# Altium PCB Card_reader2.PcbDoc
Units mm, origin at the board's own origin, x right, y up, seen from the top; angles counter-clockwise.
Board outline 95 x 98.99 mm, 2 copper layers (Top Layer, Bottom Layer); 36 components, 37 nets, 144 pads, 41 vias.
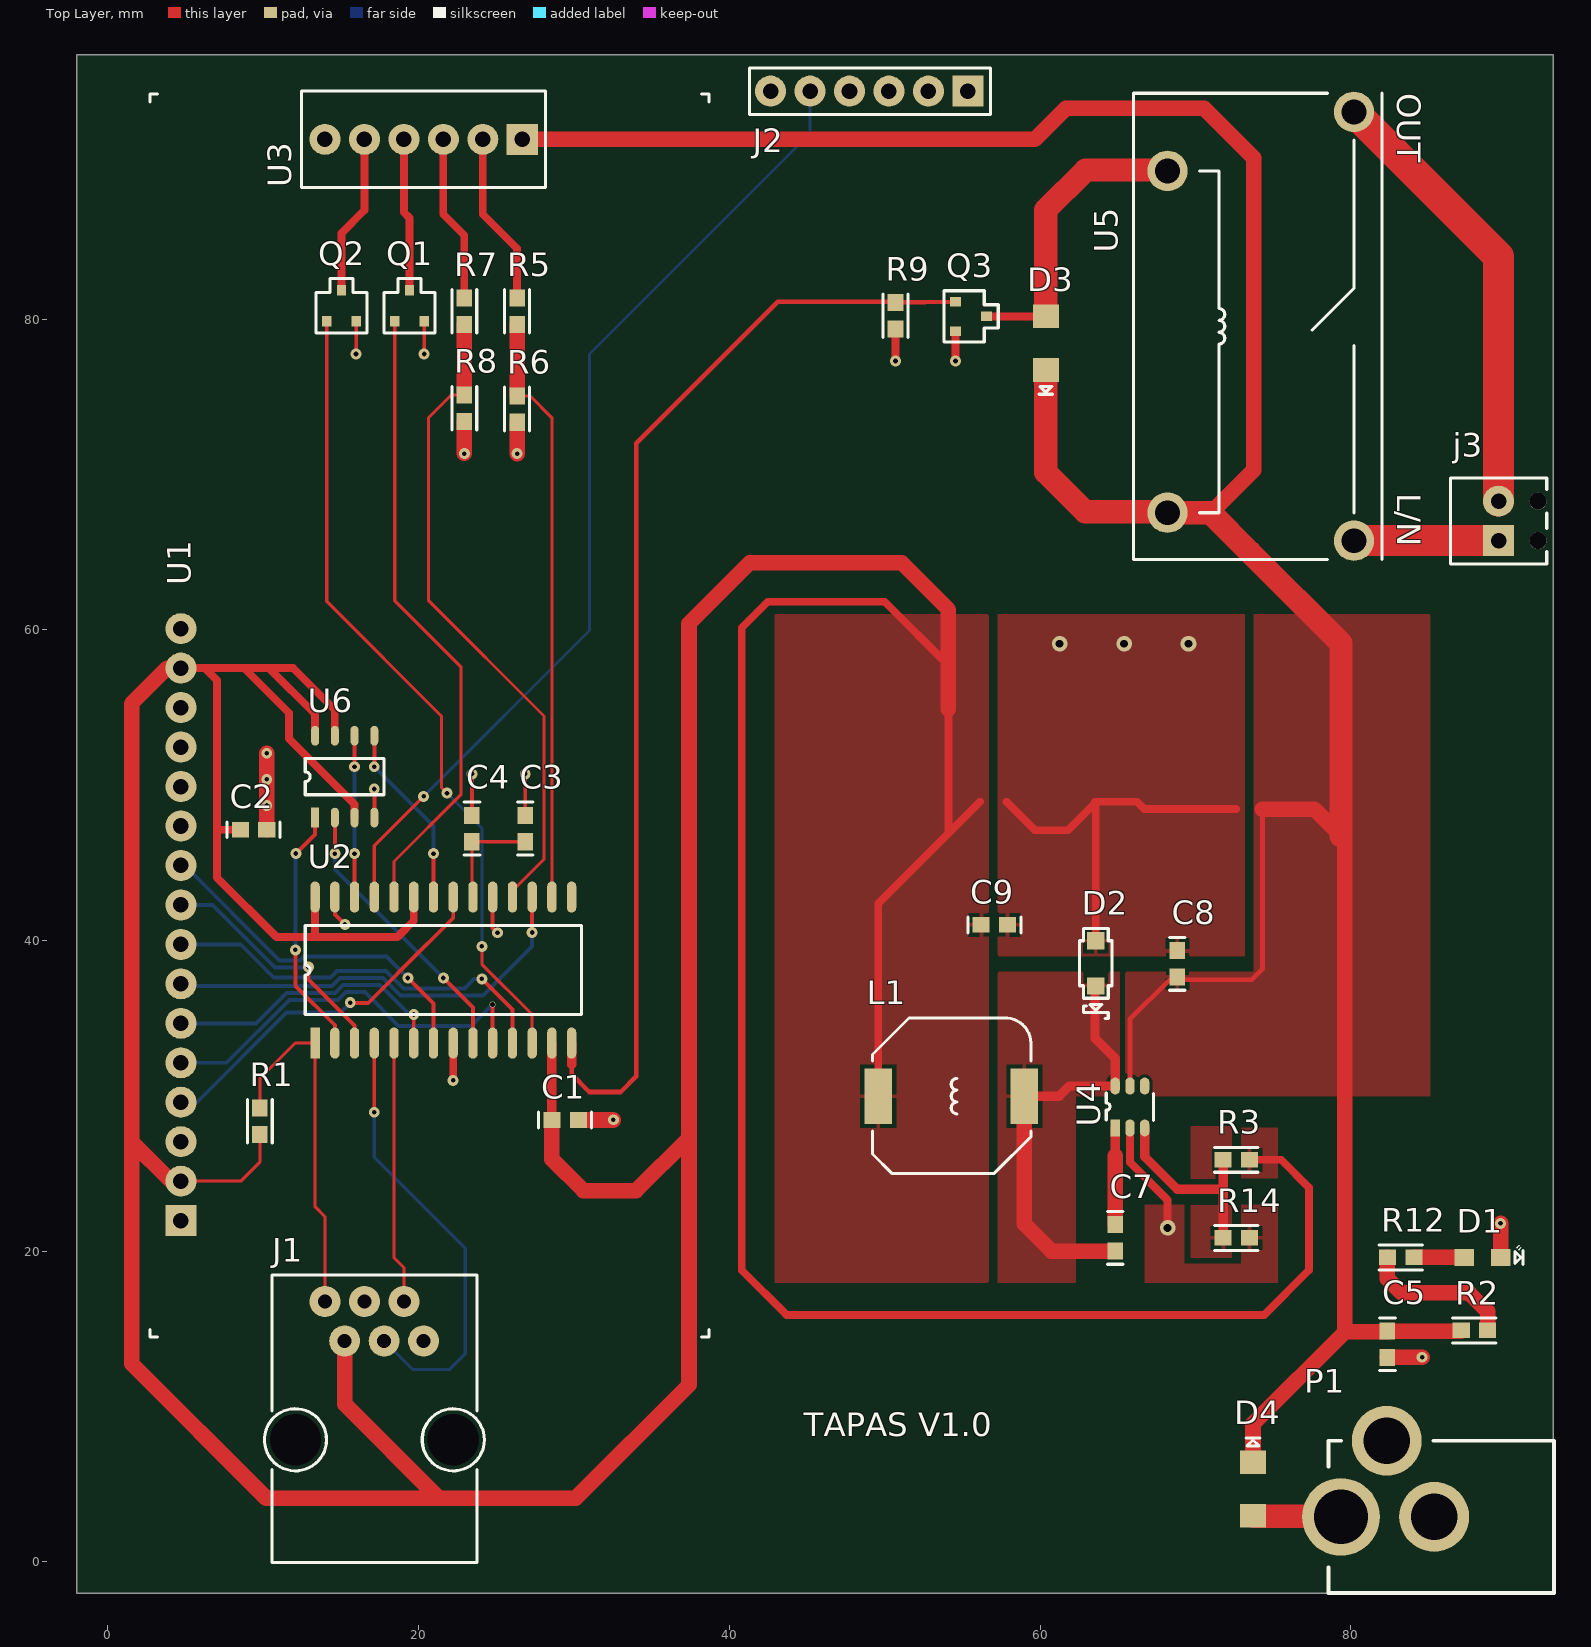
[diagram p0: Top Layer view]
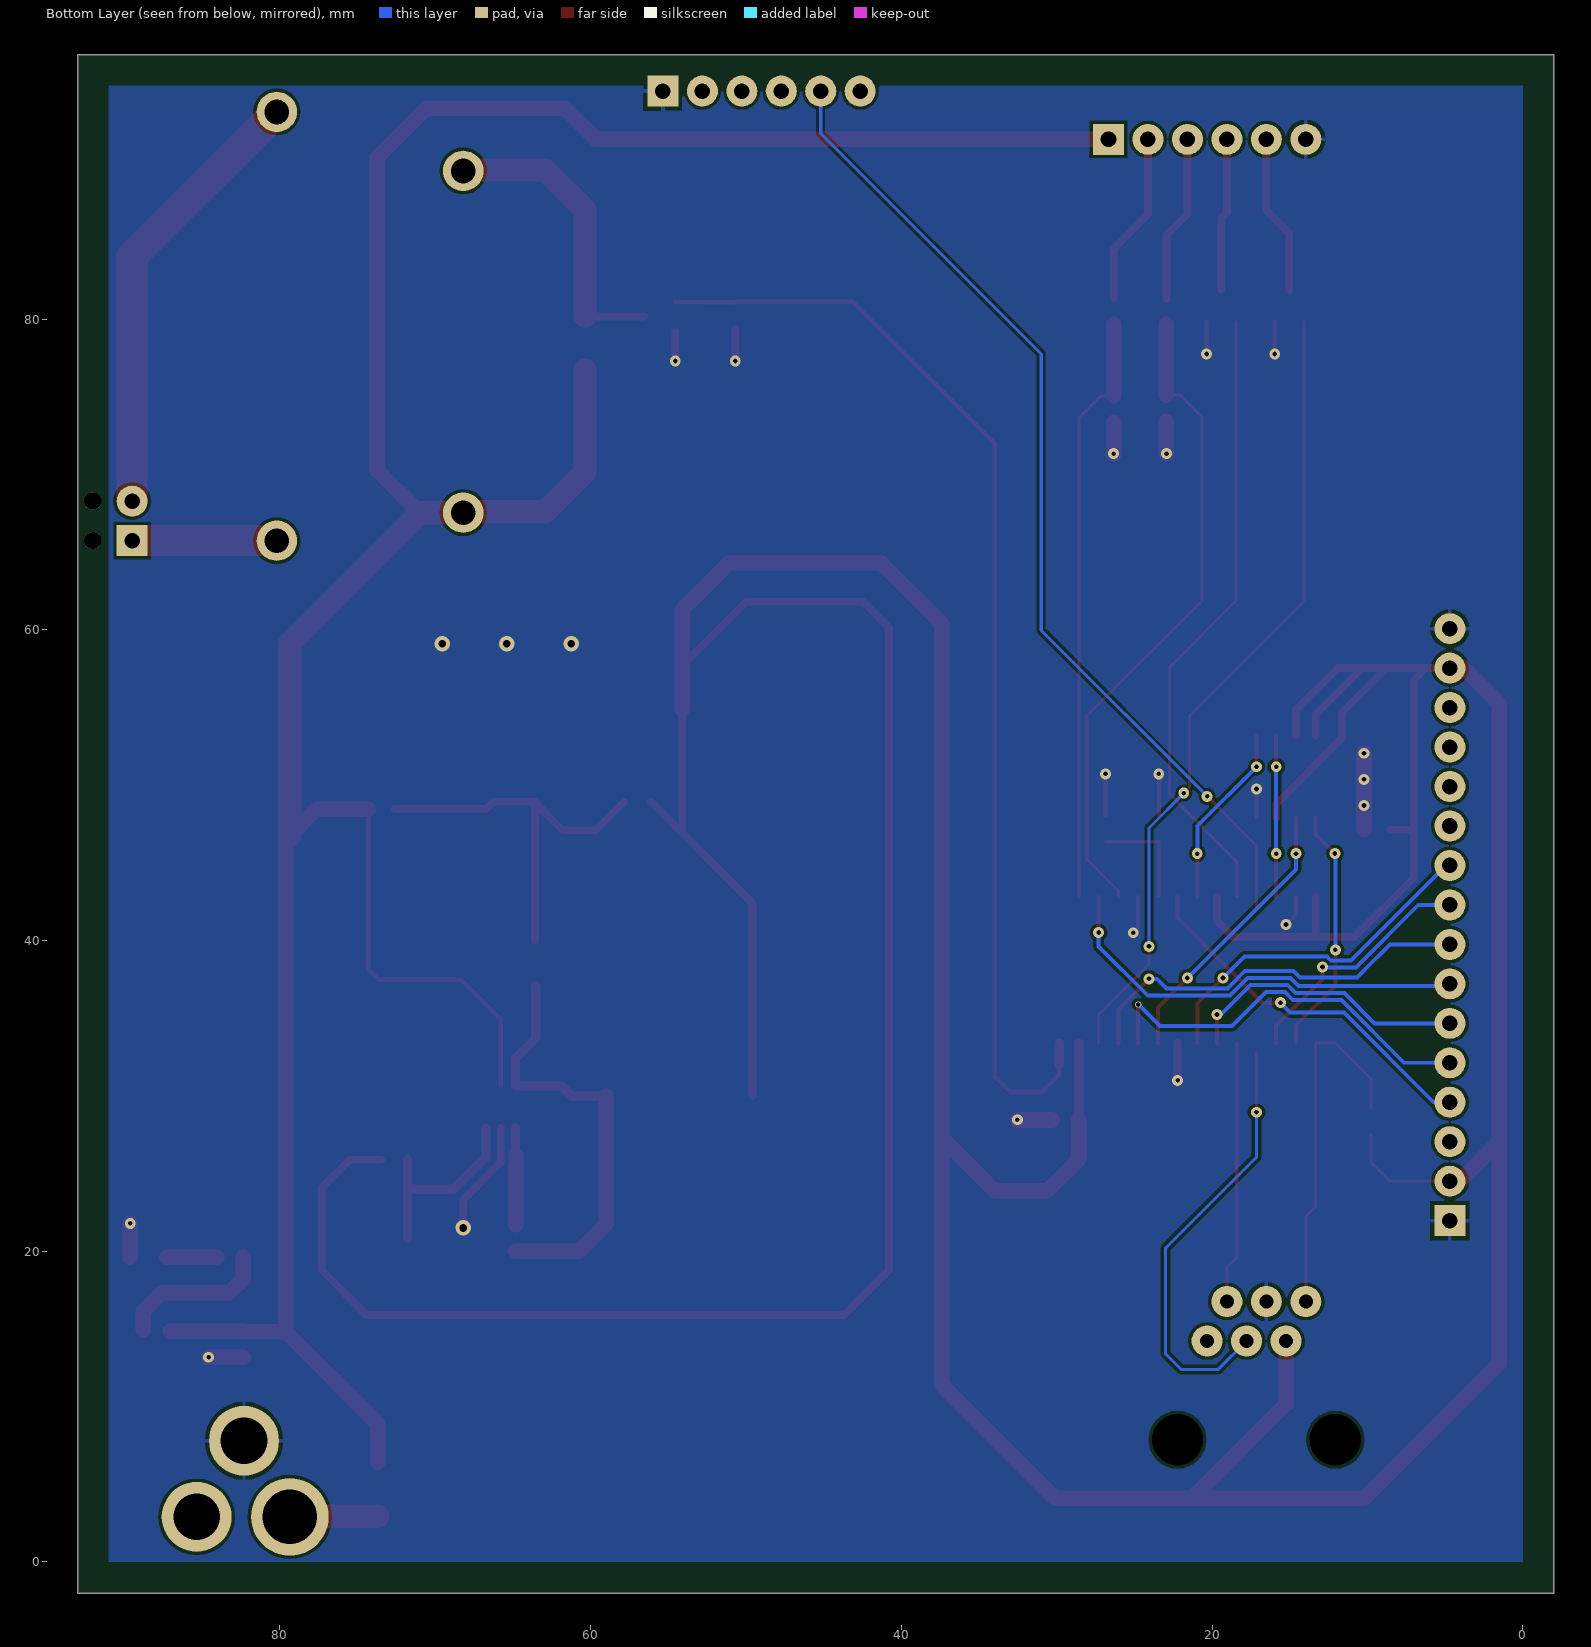
[diagram p1: Bottom Layer view, seen from below]
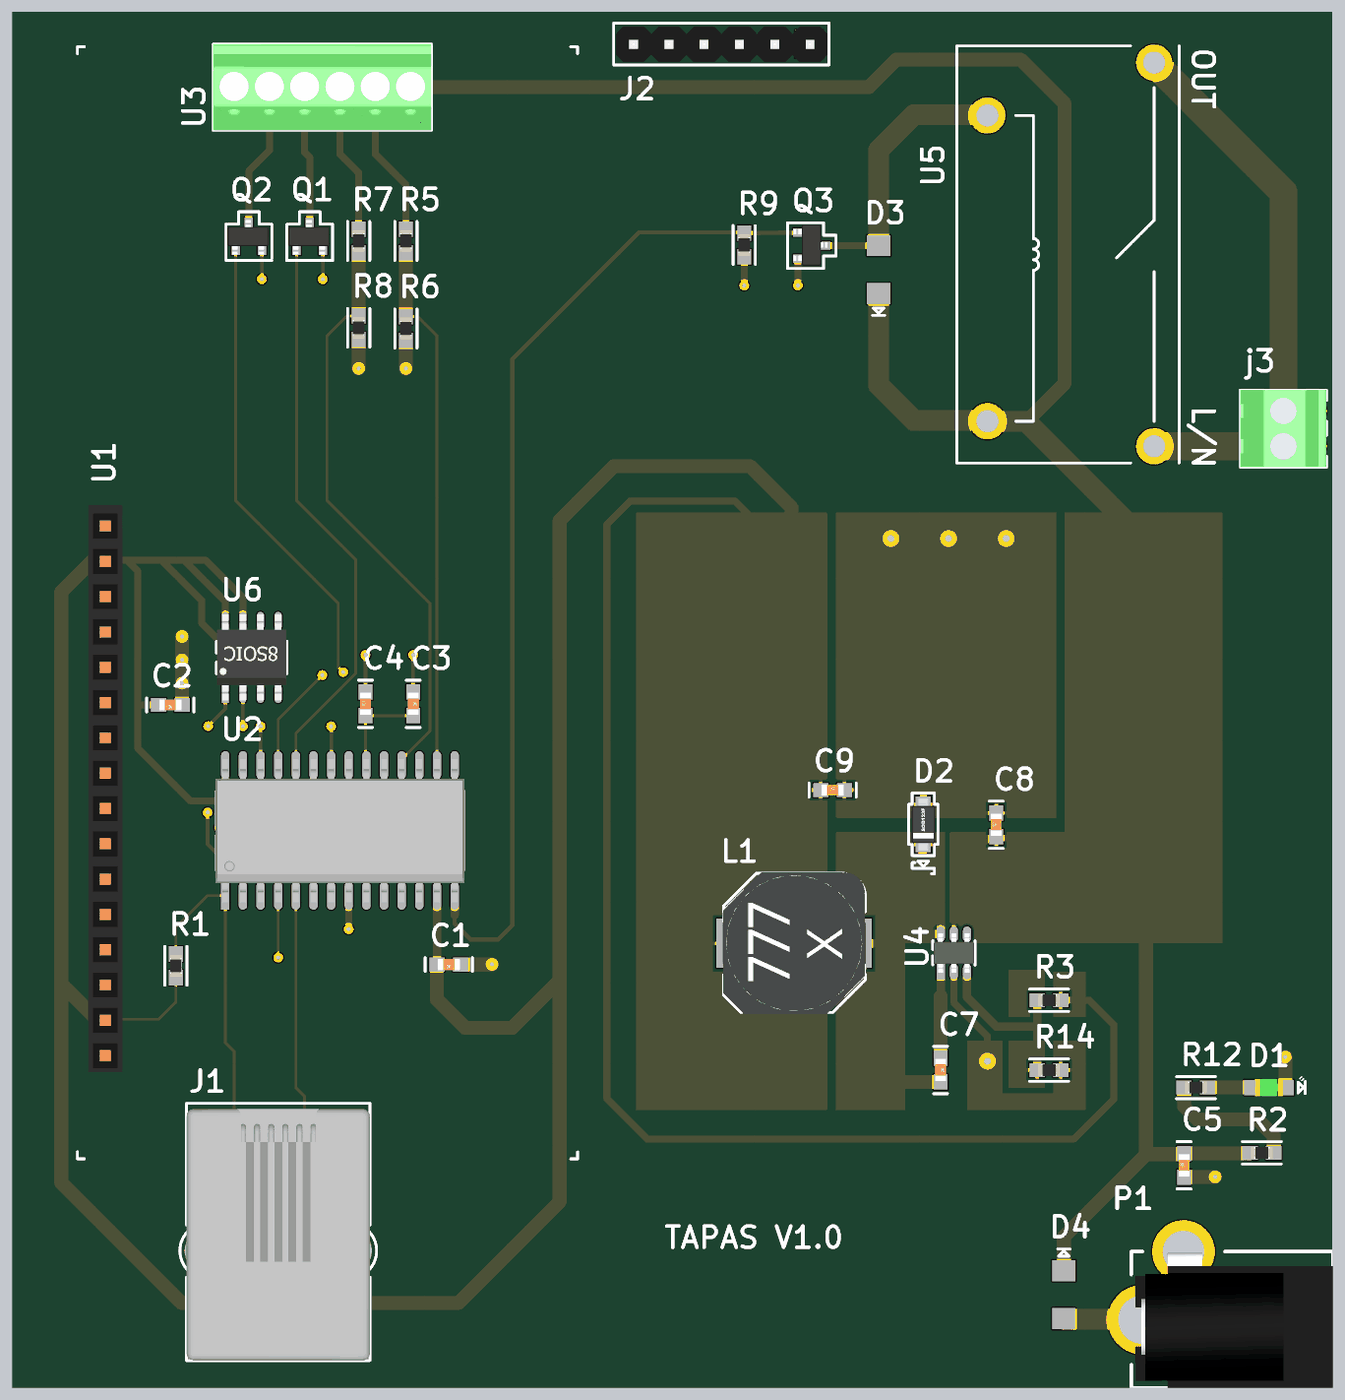
[diagram p2: 3D render of the assembled board from above, using the file's embedded part models]

## Layer stack, top to bottom
Top Solder: solder mask 0.0102, Solder Resist, Dk 3.5
Top Layer: signal copper 0.0356
Dielectric 1: dielectric 0.32, FR-4, Dk 4.8
Bottom Layer: signal copper 0.0356
Bottom Solder: solder mask 0.0102, Solder Resist, Dk 3.5

## Board outline
93.012,-1.997 93.012,96.996 -1.992,96.996 -1.992,-1.997

## Design rules (kind name [scope] priority, off if disabled: settings)
Clearance [All] p1: gap=0.2
Height [All] p1: minheight=0 maxheight=40 prefheight=12.7
HoleSize [All] p1: absolutevalues=TRUE maxlimit=4 minlimit=0.025 maxpercent=80.000 minpercent=20.000
MinimumSolderMaskSliver [All] p1: minsoldermaskwidth=0.1
PolygonConnect "Direct connect" [IsVia] p1: connectstyle=Direct reliefconductorwidth=0.254 reliefentries=4 polygonreliefangle="90 Angle" airgapwidth=0.254
PolygonConnect [All] p2: connectstyle=Relief reliefconductorwidth=0.254 reliefentries=4 polygonreliefangle="90 Angle" airgapwidth=0.254
RoutingVias [All] p1: holewidth=0.3 width=0.4 viastyle="Through Hole" minholewidth=0.3 minwidth=0.4 maxholewidth=0.711 maxwidth=1.27
SilkToSilkClearance [All] p1: silktosilkclearance=0.1
SilkToSolderMaskClearance [IsPad] p1: minsilkscreentomaskgap=0.1 clearancetoexposedcopper=TRUE
SolderMaskExpansion [All] p1: expansion=0.102
UnpouredPolygon [All] p1: allowunpoured=FALSE
Width [All] p1: maxlimit=2 minlimit=0.2 preferedwidth=0.2
24 further rules are at their usual default settings.

## Classes and differential pairs
component class Designator: C5 C7 C8 C9 D1 D2 D4 L1 P1 R2 R3 R12 R14 U4
component class Flash: U6
component class LCD: U1
component class PIC: C1 C2 C3 C4 J1 J2 R1 U2
component class Reader: Q1 Q2 R5 R6 R7 R8 U3
component class Relay: D3 j3 Q3 R9 U5

## Components (designator, comment, footprint, x,y, rotation, side; value= is the part's Value field where it differs from the comment)
C1 "100nF" "CAP 0603" 29.425,28.448 r180 top
C2 "100nF" "CAP 0603" 9.375,47.125 r180 top
C3 "10uF" "CAP 0603" 26.86,47.205 r270 top
C4 "1uF" "CAP 0603" 23.431,47.205 r90 top
C5 "10uF" "CAP 0603" 82.354,14.013 r90 top
C7 "100nF" "CAP 0603" 64.832,20.86 r270 top
C8 "4.7uF" "CAP 0603" 68.832,38.5 r90 top
C9 "22uF" "CAP 0603" 57.057,41 r0 top
D1 "Green LED" "LED 2012" 88.467,19.6 r0 top
D2 "Diode BAT17" "SOD-123F 12 mm" 61.282,34.285 r90 top
D3 "GF1A" SMA/DO-214AC_21 60.365,78.444 r270 top
D4 "GF1A" SMA/DO-214AC_21 73.7,4.7 r90 top
J1 "Program / Debug" RJ12_90 23.75,18.464 r270 top
J2 "Serial" "Header 6 pin" 49,94.667 r180 top
j3 "Bornier 2 pin" "BORNIER 2 PIN" 89.507,65.735 r90 top
L1 "33uH" IND 54.282,29.985 r90 top
P1 "MJ-179PH" "DC Jack" 93.061,2.902 r180 top
Q1 "2N7002" TO-236AB 19.412,80.853 r180 top
Q2 "2N7002" TO-236AB 15.035,80.853 r180 top
Q3 "2N7002" TO-236AB 55.555,80.169 r90 top
R1 "4.7k" "RES 0603" 9.779,28.36 r270 top
R2 "470R" "RES 0603" 87.952,14.901 r180 top
R3 "28K" "RES 0603" 72.632,25.885 r0 top
R5 "58K" "RES 0603" 26.338,80.505 r90 top
R6 "22K" "RES 0603" 26.338,74.207 r90 top
R7 "58K" "RES 0603" 22.938,80.505 r90 top
R8 "22K" "RES 0603" 22.938,74.256 r90 top
R9 "20K" "RES 0603" 50.691,80.212 r270 top
R12 "20R" "RES 0603" 83.204,19.6 r180 top
R14 "8.45K" "RES 0603" 72.632,20.86 r180 top
U1 "FDCC1602L-NSWBBW-91LE" "LCD (Only header)" 2.699,94.471 r90 top locked
U2 "PIC32MX220F032B" "SOIC (28)" 21.59,38.1 r90 top locked
U3 "LXM-R11_1" "Bornier 6 pin" 13.97,91.567 r180 top
U4 "LMR16006" "SOT (6)" 65.782,29.285 r90 top
U5 "Relay" Relay 66,64.534 r270 top
U6 "SST26VF032B-104I/SM" "SOIC 8" 15.24,50.546 r90 top

## Footprints (in the part's own frame and the unit in brackets; to place one, negate y for a bottom-side part, rotate by r counter-clockwise, add the part's x,y. Pads: shape width x height; smd on the part's side, far side on the other; paste and mask are expansions set on the pad)
"BORNIER 2 PIN" [mm]
  round 1.1 hole 1.1: 0(0,-2.54) 0(2.54,-2.54)
  rect 2x2 hole 1: 1(0,0)
  round 2 hole 1: 2(2.54,0)
  silkscreen extent -1.5,-3.1 4.04,3.1, body extent -1.5,-3.1 4.04,3.1, height 8.5
"Bornier 6 pin" [mm]
  rect 2x2 hole 1: 1(-12.7,0)
  round 2 hole 1: 2(-10.16,0) 3(-7.62,0) 4(-5.08,0) 5(-2.54,0) 6(0,0)
  silkscreen extent -14.2,-3.1 1.5,3.1, body extent -14.2,-3.1 1.5,3.1, height 8.5
"CAP 0603" [mm]
  rect 1.1x1 smd: 1(-0.85,0) 2(0.85,0)
  silkscreen extent -1.7,-0.5 1.7,0.5, body extent -0.8,-0.4 0.8,0.4, height 0.3
"DC Jack" [mm]
  round 5 hole 3.5: 1(13.7,0)
  round 4.5 hole 3: 2(10.75,-4.9) 3(7.7,0)
  silkscreen extent 0,-4.9 14.5,4.9, body extent 0,-4.8 14.2,4.9, height 10.75
"Header 6 pin" [mm]
  rect 2x2 hole 1: 1(-6.35,0)
  round 2 hole 1: 2(-3.81,0) 3(-1.27,0) 4(1.27,0) 5(3.81,0) 6(6.35,0)
  silkscreen extent -7.8,-1.5 7.7,1.5, body extent -7.7,-1.25 7.54,1.29, height 8.85
IND [mm]
  rect 3.56x1.78 smd: 1(0,-4.7) 2(0,4.7)
  silkscreen extent -4.98,-5.13 5.02,5.07, body extent -5.1,-5.15 5.1,5.15, height 5
"LCD (Only header)" [mm]
  rect 2x2 hole 1: 1(-72.5,-2)
  round 2 hole 1: 2(-69.96,-2) 3(-67.42,-2) 4(-64.88,-2) 5(-62.34,-2) 6(-59.8,-2) 7(-57.26,-2) 8(-54.72,-2) 9(-52.18,-2) 10(-49.64,-2) 11(-47.1,-2) 12(-44.56,-2) 13(-42.02,-2) 14(-39.48,-2) 15(-36.94,-2) 16(-34.4,-2)
  silkscreen extent -80,-36 0,0, body extent -73.75,-3.24 -32.96,-0.76, height 8.79
"LED 2012" [mm]
  rect 1.25x1.1 smd: 1(-1.175,0) 2(1.175,0)
  silkscreen extent 2.1,-0.43 2.61,0.76, body extent -1,-0.62 1,0.63, height 1.1
Relay [mm]
  round 2.6 hole 1.6: 11(-1.2,14.2) 14(-28.8,14.2) A1(-3,2.2) A2(-25,2.2)
  silkscreen extent -30,0 0,16, body extent -30,0 0,16, height 26.5
"RES 0603" [mm]
  rect 1.1x1 smd: 1(-0.85,0) 2(0.85,0)
  silkscreen extent -1.4,-0.8 1.4,0.8, body extent -0.77,-0.43 0.78,0.43, height 0.43
RJ12_90 [mm]
  round 2 hole 0.9: 1(1.7,-9.78) 2(4.24,-8.51) 3(1.7,-7.24) 4(4.24,-5.97) 5(1.7,-4.7) 6(4.24,-3.43)
  round 1.524 hole 3.3: ""(10.6,-1.52) ""(10.6,-11.68)
  silkscreen extent 0,-13.68 18.5,0.48, body extent 0.4,-13.2 18.5,0, height 11.75
SMA/DO-214AC_21 [mm]
  rect 1.52x1.68 smd: 1(-1.725,0) 2(1.725,0)
  silkscreen extent 2.77,-0.43 3.28,0.43, body extent -2.37,-1.45 2.38,1.45, height 2.74
"SOD-123F 12 mm" [mm]
  rect 1.1x1.1 smd: 1(5.7,-2.3) 3(2.8,-2.3)
  silkscreen extent 0.7,-3.35 6.5,-1.25, body extent 2.35,-3.15 6.1,-1.45, height 1.2
"SOIC 8" [mm]
  rect 1.27x0.51 smd: 1(-2.635,1.905)
  oval 1.27x0.51 smd: 2(-2.635,0.635) 3(-2.635,-0.635) 4(-2.635,-1.905) 5(2.635,-1.905) 6(2.635,-0.635) 7(2.635,0.635) 8(2.635,1.905)
  silkscreen extent -1.16,-2.54 1.17,2.54, body extent -3.1,-2.5 3.1,2.5, height 1.9
"SOIC (28)" [mm]
  rect 2x0.6 smd: 1(-4.7,8.255)
  oval 2x0.6 smd: 2(-4.7,6.985) 3(-4.7,5.715) 4(-4.7,4.445) 5(-4.7,3.175) 6(-4.7,1.905) 7(-4.7,0.635) 8(-4.7,-0.635) 9(-4.7,-1.905) 10(-4.7,-3.175) 11(-4.7,-4.445) 12(-4.7,-5.715) 13(-4.7,-6.985) 14(-4.7,-8.255) 15(4.7,-8.255) 16(4.7,-6.985) 17(4.7,-5.715) 18(4.7,-4.445) 19(4.7,-3.175) 20(4.7,-1.905) 21(4.7,-0.635) 22(4.7,0.635) 23(4.7,1.905) 24(4.7,3.175) 25(4.7,4.445) 26(4.7,5.715) 27(4.7,6.985) 28(4.7,8.255)
  silkscreen extent -2.86,-8.89 2.87,8.89, body extent -5.17,-8.95 5.13,8.95, height 2.65
"SOT (6)" [mm]
  rect 1.1x0.6 smd: 1(-1.35,0.95)
  oval 1.1x0.6 smd: 2(-1.35,0) 3(-1.35,-0.95) 4(1.35,-0.95) 5(1.35,0) 6(1.35,0.95)
  silkscreen extent -0.87,-1.53 0.9,1.52, body extent -1.42,-1.46 1.42,1.46, height 1.25
TO-236AB [mm]
  rect 0.6x0.7 smd: 1(0.95,1) 2(-0.95,1) 3(0,-1)
  silkscreen extent -1.65,-1.75 1.65,1.75, body extent -1.45,-1.28 1.55,1.32, height 1.1

## Part data
C1 C2 C3 C4 C5 C7 C8 C9: library part Cap, "Capacitor"
D1: library part LED2, "Typical INFRARED GaAs LED"
D2: "Silicon RF Schottky Diode for Mixer Applications in the VHF/UHF Range"
D3 D4: library part Diode, "Default Diode"
J1: library part Debug, "RJ11"
J2: "Header 6 pin"
j3: library part "Header 2 pin"
L1: library part Inductor, "Inductor"
P1: "Connecteurs DC Jacks"
Q1 Q2 Q3: "Transistor MOSFET, Canal N, 300 mA, 60 V, 2.8 ohm, 10 V, 2 V"
R1 R2 R3 R5 R6 R7 R8 R9 R12 R14: library part Res1, "Resistor"
U3: "Lecteur RFid"
U4: "Régulateurs à découpage DC/DC ajustables"
U5: "Relais de puissance"

## Via types
v1: diameter 0.7, hole 0.3, Top Layer to Bottom Layer, 36 vias
v2: diameter 1, hole 0.5, Top Layer to Bottom Layer, 4 vias
v3: diameter 0.4, hole 0.3, Top Layer to Bottom Layer, 1 vias

## Nets (pads, with @x,y where several pads share a name; then routed paths per layer and width w, separated by ;. In a path a pad name is that pad's centre, name@x,y a point inside that pad or via, vN(x,y) a via of type N, cw(c..) or ccw(c..) an arc to the next point about the centre after c; other vN are vias at no path point)
ALIM: D4.1 P1.1 | length 6.3
  Top Layer w1: P1.1@79.959,2.939 P1.1@79.966,2.932
  Top Layer w1.5: D4.1@73.7,2.939 P1.1@79.959,2.939
CE: U2.2 U6.1 | length 16.1
  Top Layer w0.254: v1(12.065,39.4) 12.065,37.084 14.605,34.544 U2.2 ; v1(12.1,45.6) 13.335,46.835 U6.1
  Bottom Layer w0.254: v1(12.065,39.4) 12.065,45.565 v1(12.1,45.6)
DATA0: R5.2 U3.2 | length 11.1
  Top Layer w0.5: U3.2 24.13,86.741 26.338,84.533 R5.2
DATA1: R7.2 U3.3 | length 10.8
  Top Layer w0.5: U3.3 21.59,86.741 22.938,85.393 R7.2@22.938,81.28
DB0: U1.7 U2.17 | length 27.8
  Top Layer w0.254: v1(27.305,40.513) U2.17
  Bottom Layer w0.254: U1.7 4.836,37.074 14.432,37.074 14.943,37.585 17.712,37.585 18.836,36.461 24.142,36.461 27.305,39.624 v1(27.305,40.513)
DB1: U1.8 U2.11 | length 26.1
  Top Layer w0.254: v1(24.066,37.529) 26.035,35.56 U2.11
  Bottom Layer w0.254: U1.8 8.549,39.751 10.215,38.085 10.215,38.081 10.673,37.623 14.339,37.623 14.755,38.039 17.9,38.039 19.024,36.915 21.31,36.915 22.945,36.915 23.558,37.529 v1(24.066,37.529)
DB2: U1.9 U2.3 | length 16
  Top Layer w0.254: v1(12.9,38.3) 12.9,37.496 15.875,34.521 U2.3
  Bottom Layer w0.254: U1.9 6.731,42.291 10.753,38.269 12.869,38.269 v1(12.9,38.3)
DB3: U1.10 U2.7 | length 22.7
  Top Layer w0.254: v1(19.304,37.592) 20.955,35.941 U2.7
  Bottom Layer w0.254: U1.10 4.944,44.831 11.052,38.723 12.366,38.723 12.62,38.977 17.919,38.977 v1(19.304,37.592)
"DISABLE GREEN": Q2.1 U2.12 | length 51.9
  Top Layer w0.2: Q2.1 14.085,61.829 21.463,54.451 21.463,49.847 v1(21.823,49.488) ; v1(24.066,39.624) 24.066,38.481 27.305,35.242 U2.12
  Bottom Layer w0.2: v1(21.823,49.488) 24.066,47.244 v1(24.066,39.624)
"DISABLE RED": Q1.1 U2.24 | length 40.6
  Top Layer w0.2: U2.24 18.415,45.085 22.733,49.403 22.733,57.597 18.462,61.869 Q1.1
E: U1.6 U2.6 | length 18.6
  Top Layer w0.254: U2.6 v1(19.685,35.235)
  Bottom Layer w0.254: U1.6 9.537,34.671 11.486,36.62 14.621,36.62 15.132,37.131 17.523,37.131 19.419,35.235 v1(19.685,35.235)
GND: C1.1 C2.1 C3.1 C4.2 C5.1 C8.2 C9.2 D1.2 D2.1 J1.3 J2.1 P1.2 Q1.2 Q2.2 Q3.2 R6.1 R8.1 R9.2 R14.1 U1.1 U1.16 U2.8 U2.19 U2.27 U3.6 U4.2 U6.4 | length 70.7
  Top Layer w0.254: U2.27 14.605,41.672 v1(15.248,41.029) ; v1@15.985,77.702 Q2.2 ; U6.4 v1(17.145,49.754) ; v1@20.362,77.739 Q1.2 ; C4.2 v1@23.431,50.568 ; U2.19 24.765,40.81 v1(25.075,40.5) ; C3.1 v1(26.86,50.725)
  Top Layer w0.5: v1@22.225,31.009 U2.8 ; v1(50.691,77.3) R9.2 ; v1(54.555,77.3) Q3.2 ; 57.832,48.935 59.667,47.1 61.797,47.1 63.582,48.885 D2.1 ; 63.532,48.935 66.232,48.935 66.707,48.46 72.607,48.46 ; U4.2 65.782,25.718 68.2,23.3 v2(68.2,21.5)
  Top Layer w1: C2.1 v1(10.225,52.05) ; v1@22.938,71.348 R8.1 ; v1@26.338,71.323 R6.1 R6.1@26.338,73.367 ; C1.1 v1@32.516,28.448 ; C5.1 v1@84.584,13.163 ; D1.2 v1@89.642,21.811
  other v1: 84.589,13.18 89.635,21.797 32.533,28.465 22.216,31 10.225,48.693 10.225,50.371 23.431,50.725 22.94,71.334 26.339,71.334 15.968,77.751 20.352,77.751
  other v2: 61.25,59.1 65.4,59.1 69.55,59.1
"GREEN LED": Q2.3 U3.5 | length 10.3
  Top Layer w0.5: Q2.3 15.035,85.52 16.51,86.995 U3.5
L/N: j3.1 U5.11 | length 9.3
  Top Layer w2: U5.11@80.202,65.735 j3.1
MCLR: J1.1 R1.1 U2.1 | length 23.2
  Top Layer w0.2: R1.1 9.779,31.115 12.064,33.4 U2.1 13.335,22.86 13.97,22.225 J1.1@13.97,16.891
MISO: U2.9 U6.2 | length 18.2
  Top Layer w0.254: v1(14.605,45.593) U6.2 ; v1(21.59,37.592) 23.495,35.687 U2.9
  Bottom Layer w0.254: v1(14.605,45.593) 14.605,44.577 v1(21.59,37.592)
MOSI: U2.22 U6.5 | length 12
  Top Layer w0.254: v1(17.145,51.181) U6.5 ; U2.22 v1(20.955,45.593)
  Bottom Layer w0.254: v1(17.145,51.181) 20.955,47.371 v1(20.955,45.593)
NetC3_2: C3.2 C4.1 U2.20 | length 7
  Top Layer w0.2: U2.20 23.431,42.864 C4.1 C3.2
NetC7_1: C7.1 U4.1 | length 6.2
  Top Layer w0.6: 64.832,26.135 U4.1
  Top Layer w1: C7.1 64.832,26.135
NetC7_2: C7.2 D2.3 L1.1 U4.6 | length 27.9
  Top Layer w0.6: L1.1 61.232,29.985 61.882,30.635 U4.6 64.832,32.41 63.532,33.71 63.532,37.035 D2.3
  Top Layer w1: L1.1 58.982,21.76 60.732,20.01 C7.2
NetD1_1: D1.1 R12.1 | length 3.2
  Top Layer w1: R12.1 D1.1
NetD3_1: D3.1 Q3.3 U5.A2 | length 19.5
  Top Layer w0.5: Q3.3 D3.1
  Top Layer w1.5: D3.1 60.365,87.023 62.929,89.587 U5.A2@68.177,89.587
NetR2_1: R2.1 R12.2 | length 9.9
  Top Layer w1: R12.2 82.354,18.233 83.273,17.314 87.61,17.314 88.802,16.122 R2.1
NetR3_1: R3.1 R14.2 U4.3 | length 12.8
  Top Layer w0.6: U4.3 66.732,26.085 68.832,23.985 71.757,23.985 ; R14.2 R3.1
NetR5_1: R5.1 R6.2 U2.16 | length 38.3
  Top Layer w0.2: R6.2 27.168,75.057 28.575,73.65 U2.16
  Top Layer w1: R6.2 R5.1
NetR7_1: R7.1 R8.2 U2.18 | length 42.2
  Top Layer w0.2: R8.2 22.092,75.106 20.644,73.658 20.644,61.869 28.067,54.446 28.067,45.223 26.035,43.191 U2.18
  Top Layer w1: R8.2 R7.1
OUT: j3.2 U5.14 | length 28.9
  Top Layer w2: U5.14 89.507,84.027 j3.2
PGC: J1.5 U2.5 | length 16.9
  Top Layer w0.2: U2.5 18.415,19.585 19.05,18.95 J1.5
PGD: J1.4 U2.4 | length 28.2
  Top Layer w0.2: v1(17.145,28.948) U2.4@17.145,32.796
  Bottom Layer w0.2: v1(17.145,28.948) 17.145,26.049 23,20.194 23,13.4 22,12.4 19.604,12.4 J1.4
R/W: U1.5 U2.10 | length 25.9
  Top Layer w0.254: v3(24.75,35.882) 24.765,35.867 U2.10
  Bottom Layer w0.254: U1.5 7.639,32.131 11.674,36.166 14.809,36.166 15.32,36.677 16.536,36.677 18.713,34.5 23.368,34.5 v3(24.75,35.882)
"RED LED": Q1.3 U3.4 | length 9.8
  Top Layer w0.5: U3.4 19.05,86.868 19.413,86.505 Q1.3@19.413,81.888
RELAY: Q3.1 R9.1 U2.14 | length 72.1
  Top Layer w0.3: 29.845,32.019 29.845,31.39 30.985,30.25 33,30.25 34,31.25 34,72 43.119,81.119 R9.1@50.635,81.119 ; R9.1 Q3.1
  Top Layer w0.6: 29.845,32.019 U2.14
RS: U1.4 U2.21 | length 23.8
  Top Layer w0.254: v1@15.6,35.976 v1(15.6,36) ; v1@15.6,35.988 16.755,35.988 18.627,37.86 18.627,37.872 19.024,38.269 19.036,38.269 22.225,41.458 U2.21
  Bottom Layer w0.254: U1.4 5.741,29.591 11.503,35.353 14.977,35.353 15.6,35.976 v1(15.6,36)
SCK: U2.26 U6.6 | length 10.4
  Top Layer w0.254: U2.26 v1(15.875,45.593) ; v1(15.875,51.181) U6.6
  Bottom Layer w0.254: v1(15.875,45.593) v1(15.875,51.181)
TX: J2.5 U2.25 | length 64.1
  Top Layer w0.2: U2.25@17.145,42.164 U2.25 17.145,46.101 v1(20.32,49.276)
  Bottom Layer w0.2: v1(20.32,49.276) 31,59.956 31,77.751 45.19,91.941 J2.5
V3P3: C1.2 C2.2 C9.1 J1.2 L1.2 R1.2 R3.2 U1.2 U1.15 U2.13 U2.23 U2.28 U6.3 U6.7 U6.8 | length 409.7
  Top Layer w0.2: U1.2 8.558,24.511 9.779,25.732 R1.2 ; 6.225,57.55 6.244,57.531
  Top Layer w0.5: U1.15 6.244,57.531 ; C2.2 7.15,47.125 7.025,47.25 ; 13.335,40.385 U2.28 ; U6.8 13.335,54.565 10.369,57.531 ; U6.7 14.605,54.847 11.921,57.531 10.369,57.531 ; U6.3 15.875,48.775 11.65,53 11.65,54.65 8.769,57.531 ; U2.23 19.685,41.275 18.639,40.229 10.846,40.229 7.025,44.05 7.025,47.25 ; L1.2 49.582,42.385 56.132,48.935 ; 54.1,47.1 54.1,57.7 50,61.8 42.465,61.8 40.8,60.135 40.8,18.781 43.681,15.9 74.422,15.9 77.3,18.778 77.3,24.1 75.515,25.885 R3.2 ; 6.244,57.531 7.025,56.75 7.025,47.25 ; 6.244,57.531 8.769,57.531 ; 8.769,57.531 10.369,57.531
  Top Layer w0.6: C1.2 U2.13
  Top Layer w1: U1.2 4.064,24.511 1.524,27.051 ; U1.15 3.81,57.531 1.524,55.245 1.524,27.051 ; J1.2 15.24,10.16 21.294,4.106 ; C1.2 28.575,25.925 30.6,23.9 34,23.9 37.4,27.3 ; 54.1,54.9 54.1,61.3 51.1,64.3 41.3,64.3 37.4,60.4 37.4,11.4 30.106,4.106 10.194,4.106 1.524,12.776 1.524,27.051
V12: C5.2 C8.1 D3.2 D4.2 R2.2 U3.1 U4.5 U5.A1 | length 199.5
  Top Layer w0.3: U4.5 65.782,34.935 68.332,37.485 73.632,37.485 74.307,38.16 74.307,48.46
  Top Layer w0.5: R2.2@87.064,14.863 R2.2
  Top Layer w1: U3.1 59.664,91.567 61.652,93.555 70.566,93.555 73.75,90.371 73.75,70.284 71,67.534 71,67.5 73.5,65 ; D4.2 73.7,8.9 79.613,14.813 ; 74.307,48.46 77.64,48.46 79.361,46.739 ; 79.613,46.487 79.613,14.813 ; C5.2@82.354,14.813 79.613,14.813 ; C5.2 R2.2@87.064,14.863
  Top Layer w1.5: D3.2 60.365,70.127 62.905,67.587 U5.A1@68.177,67.587 ; U5.A1 70.966,67.534 73.5,65 79.361,59.139 79.361,46.739
pads on no net: J1. J1.6 J2.2 J2.3 J2.4 J2.6 j3.0 P1.3 U1.3 U1.11 U1.12 U1.13 U1.14 U2.15 U4.4

## Polygon pours and split planes (outlines as drawn)
GND on Bottom Layer "GND_L02_P002" (solid, remove dead copper, pour order 10): 0,95 0,0 91,0 91,95
V3P3 on Top Layer "Top Layer-No Net" (solid, pour order 12): 42.916,17.985 56.682,17.985 56.682,60.985 42.916,60.985
NetC7_2 on Top Layer "Top Layer-No Net" (solid, pour order 13): 57.282,17.985 57.282,37.985 65.132,37.985 65.132,29.985 62.282,29.985 62.282,17.985
V12 on Top Layer "Top Layer-No Net" (solid, pour order 14): 85.118,60.985 73.757,60.985 73.757,37.985 65.482,37.985 65.482,29.985 85.118,29.985
GND on Top Layer "Top Layer-No Net" (solid, pour order 11): 57.282,38.985 73.157,38.985 73.157,60.985 57.282,60.985
GND on Top Layer "Top Layer-No Net" (solid, pour order 18): 66.732,22.985 66.732,17.985 75.282,17.985 75.282,22.985 72.932,22.985 72.932,19.185 69.282,19.185 69.282,22.985
NetR3_1 on Top Layer "Top Layer-No Net" (solid, pour order 17): 69.707,19.585 69.707,22.96 72.332,22.96 72.332,19.585
NetD3_1 on Top Layer "Top Layer-No Net" (solid, pour order 16): 69.707,24.66 69.707,28.06 72.332,28.06 72.332,24.66
V3P3 on Top Layer "Top Layer-No Net" (solid, pour order 15): 72.932,24.685 72.932,27.935 75.282,27.935 75.282,24.685

## Silkscreen, mask and mechanical layers (free items; w line width, h text height)
Top Overlay:
  text "TAPAS V1.0" at 44.8,8.1 h1.52
Drill Drawing:
  circle w0.025: c112.54,21.753 r0.635
  lines w0.025: 111.905,9.688 111.905,10.006 112.223,10.323 111.905,10.641 111.905,10.958 112.223,10.958 112.54,10.641 112.858,10.958 113.175,10.958 113.175,10.641 112.858,10.323 113.175,10.006 113.175,9.688 112.858,9.688 112.54,10.006 112.223,9.688 111.905,9.688 ; 111.905,13.816 112.223,13.816 112.223,13.498 112.858,13.498 112.858,13.816 113.175,13.816 113.175,14.451 112.858,14.451 112.858,14.768 112.223,14.768 112.223,14.451 111.905,14.451 111.905,13.816 ; 111.905,17.308 112.54,17.626 113.175,17.308 112.858,17.943 113.175,18.578 112.54,18.261 111.905,18.578 112.223,17.943 111.905,17.308 ; 111.905,25.246 112.223,25.246 112.54,24.928 112.858,25.246 113.175,25.246 112.858,25.563 113.175,25.881 112.858,25.881 112.54,26.198 112.223,25.881 111.905,25.881 112.223,25.563 111.905,25.246 ; 111.905,30.008 113.175,30.008 112.54,28.738 111.905,30.008 ; 111.905,32.548 113.175,32.548 113.175,33.818 111.905,33.818 111.905,32.548 ; 111.905,36.358 113.175,36.358 113.175,37.628 111.905,37.628 111.905,36.358 ; 112.159,9.942 112.159,10.133 112.35,10.323 112.159,10.514 112.159,10.704 112.35,10.704 112.54,10.514 112.731,10.704 112.921,10.704 112.921,10.514 112.731,10.323 112.921,10.133 112.921,9.942 112.731,9.942 112.54,10.133 112.35,9.942 112.159,9.942 ; 112.159,13.943 112.35,13.943 112.35,13.752 112.731,13.752 112.731,13.943 112.921,13.943 112.921,14.324 112.731,14.324 112.731,14.514 112.35,14.514 112.35,14.324 112.159,14.324 112.159,13.943 ; 112.159,17.562 112.54,17.753 112.921,17.562 112.731,17.943 112.921,18.324 112.54,18.134 112.159,18.324 112.35,17.943 112.159,17.562 ; 112.159,25.373 112.35,25.373 112.54,25.182 112.731,25.373 112.921,25.373 112.731,25.563 112.921,25.754 112.731,25.754 112.54,25.944 112.35,25.754 112.159,25.754 112.35,25.563 112.159,25.373 ; 112.159,29.754 112.921,29.754 112.54,28.992 112.159,29.754 ; 112.159,36.612 112.921,36.612 112.921,37.374 112.159,37.374 112.159,36.612
  lines w0.381: 110.175,4.735 199.712,4.735 ; 110.175,39.025 199.712,39.025 ; 124.167,0.925 124.167,42.835 ; 137.88,0.925 137.88,42.835 ; 167.081,0.925 167.081,42.835 ; 179.93,0.925 179.93,42.835 ; 110.175,0.925 199.712,0.925 199.712,42.835 110.175,42.835 110.175,0.925
  text "Symbol" at 112.461,40.168 h1.83
  text "Count" at 125.31,40.168 h1.83
  text "Hole Size" at 139.023,40.168 h1.83
  text "Plated" at 168.224,40.168 h1.83
  text "Hole Type" at 181.073,40.168 h1.83
  text "37" at 125.31,36.358 h1.52
  text "0.300mm (11.81mil)" at 139.023,36.358 h1.52
  text "PTH" at 168.224,36.358 h1.52
  text "Round" at 181.073,36.358 h1.52
  text "4" at 125.31,32.548 h1.52
  text "0.500mm (19.69mil)" at 139.023,32.548 h1.52
  text "PTH" at 168.224,32.548 h1.52
  text "Round" at 181.073,32.548 h1.52
  text "6" at 125.31,28.738 h1.52
  text "0.900mm (35.43mil)" at 139.023,28.738 h1.52
  text "PTH" at 168.224,28.738 h1.52
  text "Round" at 181.073,28.738 h1.52
  text "30" at 125.31,24.928 h1.52
  text "1.000mm (39.37mil)" at 139.023,24.928 h1.52
  text "PTH" at 168.224,24.928 h1.52
  text "Round" at 181.073,24.928 h1.52
  text "2" at 125.31,21.118 h1.52
  text "1.100mm (43.31mil)" at 139.023,21.118 h1.52
  text "PTH" at 168.224,21.118 h1.52
  text "Round" at 181.073,21.118 h1.52
  text "4" at 125.31,17.308 h1.52
  text "1.600mm (62.99mil)" at 139.023,17.308 h1.52
  text "PTH" at 168.224,17.308 h1.52
  text "Round" at 181.073,17.308 h1.52
  text "2" at 125.31,13.498 h1.52
  text "3.000mm (118.11mil)" at 139.023,13.498 h1.52
  text "PTH" at 168.224,13.498 h1.52
  text "Round" at 181.073,13.498 h1.52
  text "2" at 125.31,9.688 h1.52
  text "3.300mm (129.92mil)" at 139.023,9.688 h1.52
  text "PTH" at 168.224,9.688 h1.52
  text "Round" at 181.073,9.688 h1.52
  text "A" at 112.223,6.196 h1.27
  text "1" at 125.31,5.878 h1.52
  text "3.500mm (137.80mil)" at 139.023,5.878 h1.52
  text "PTH" at 168.224,5.878 h1.52
  text "Round" at 181.073,5.878 h1.52
  text "88 Total" at 125.31,2.068 h1.52
Board Outline:
  lines w0.381: -2,-2 93,-2 93,97 -2,97 -2,-2

## Dimensions
-1.992,-1.997 to -1.992,96.996 on Dimensions
-1.992,96.996 to 93.012,96.996 on Dimensions

## Text inside footprints (layer, text, board x,y; h text height)
U5: Top Overlay "L/N" at 83,68.784 h1.52 r270; Top Overlay "OUT" at 83,94.534 h1.52 r270